# Altium PCB pulser one pad.PcbDoc
Units mil, origin at the board's own origin, x right, y up, seen from the top; angles counter-clockwise.
Board outline 1375 x 1010 mil, 2 copper layers (Top Layer, Bottom Layer); 38 components, 23 nets, 110 pads, 20 vias.
Unrouted connection lines stored in the file: 1.
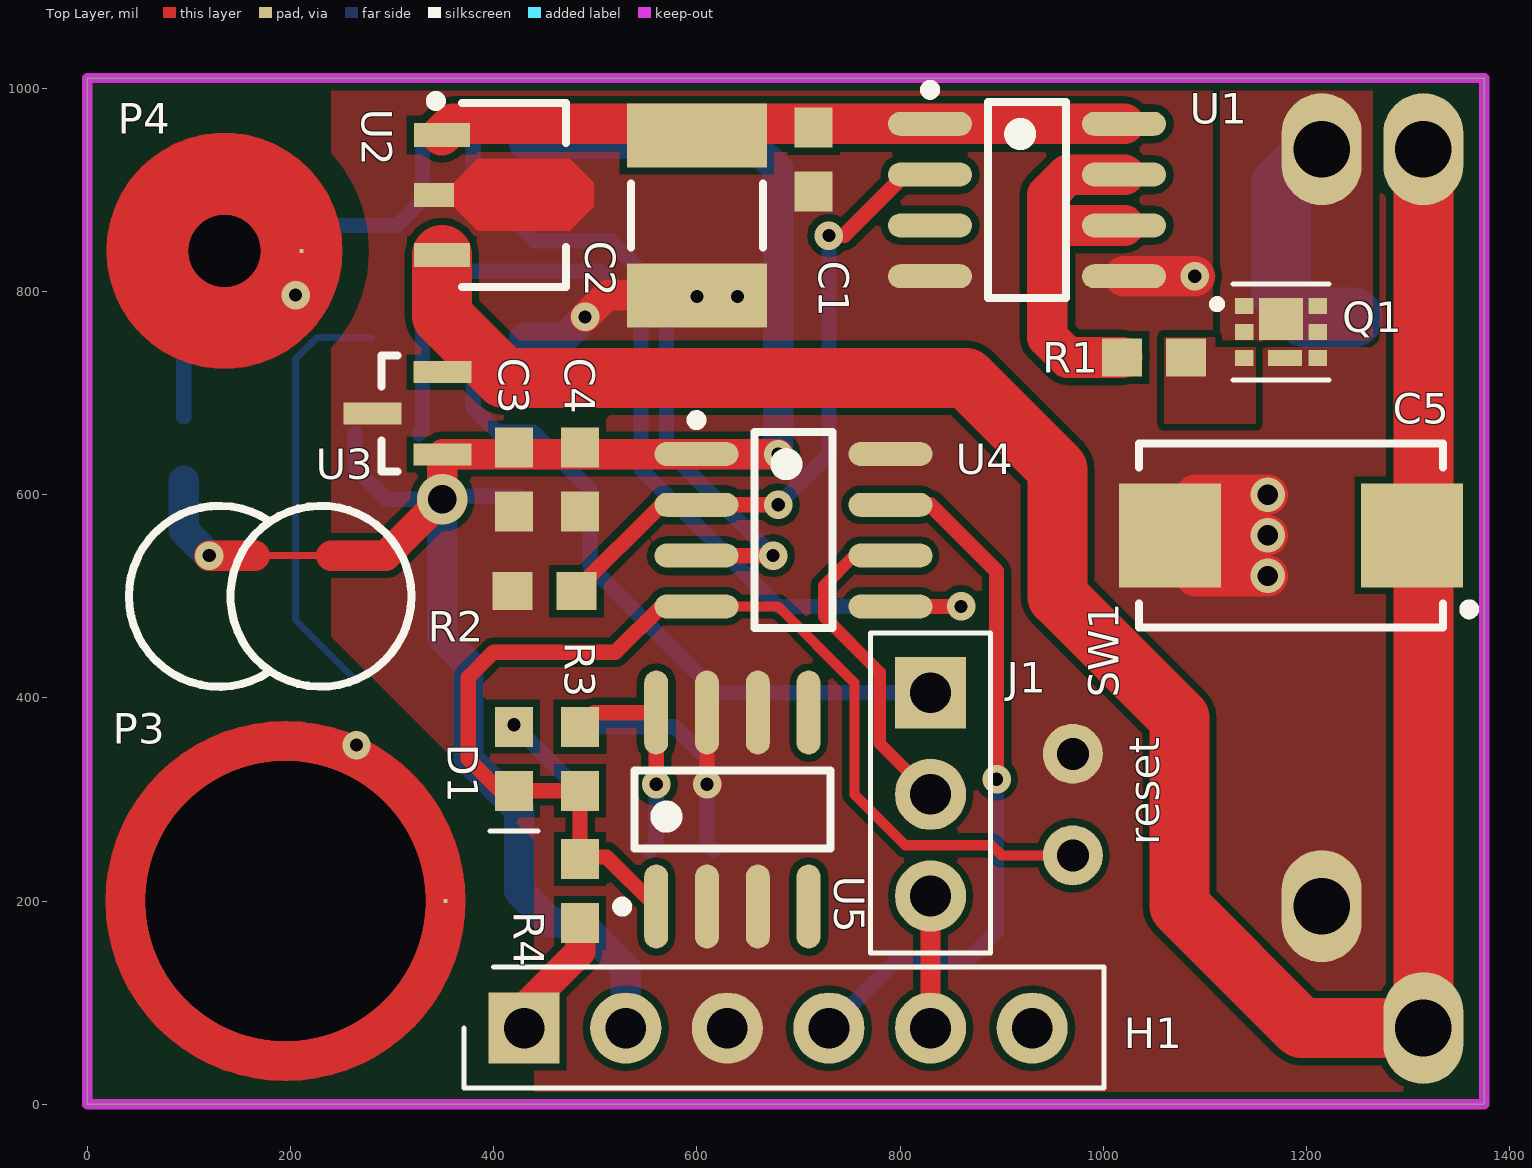
[diagram p0: Top Layer view]
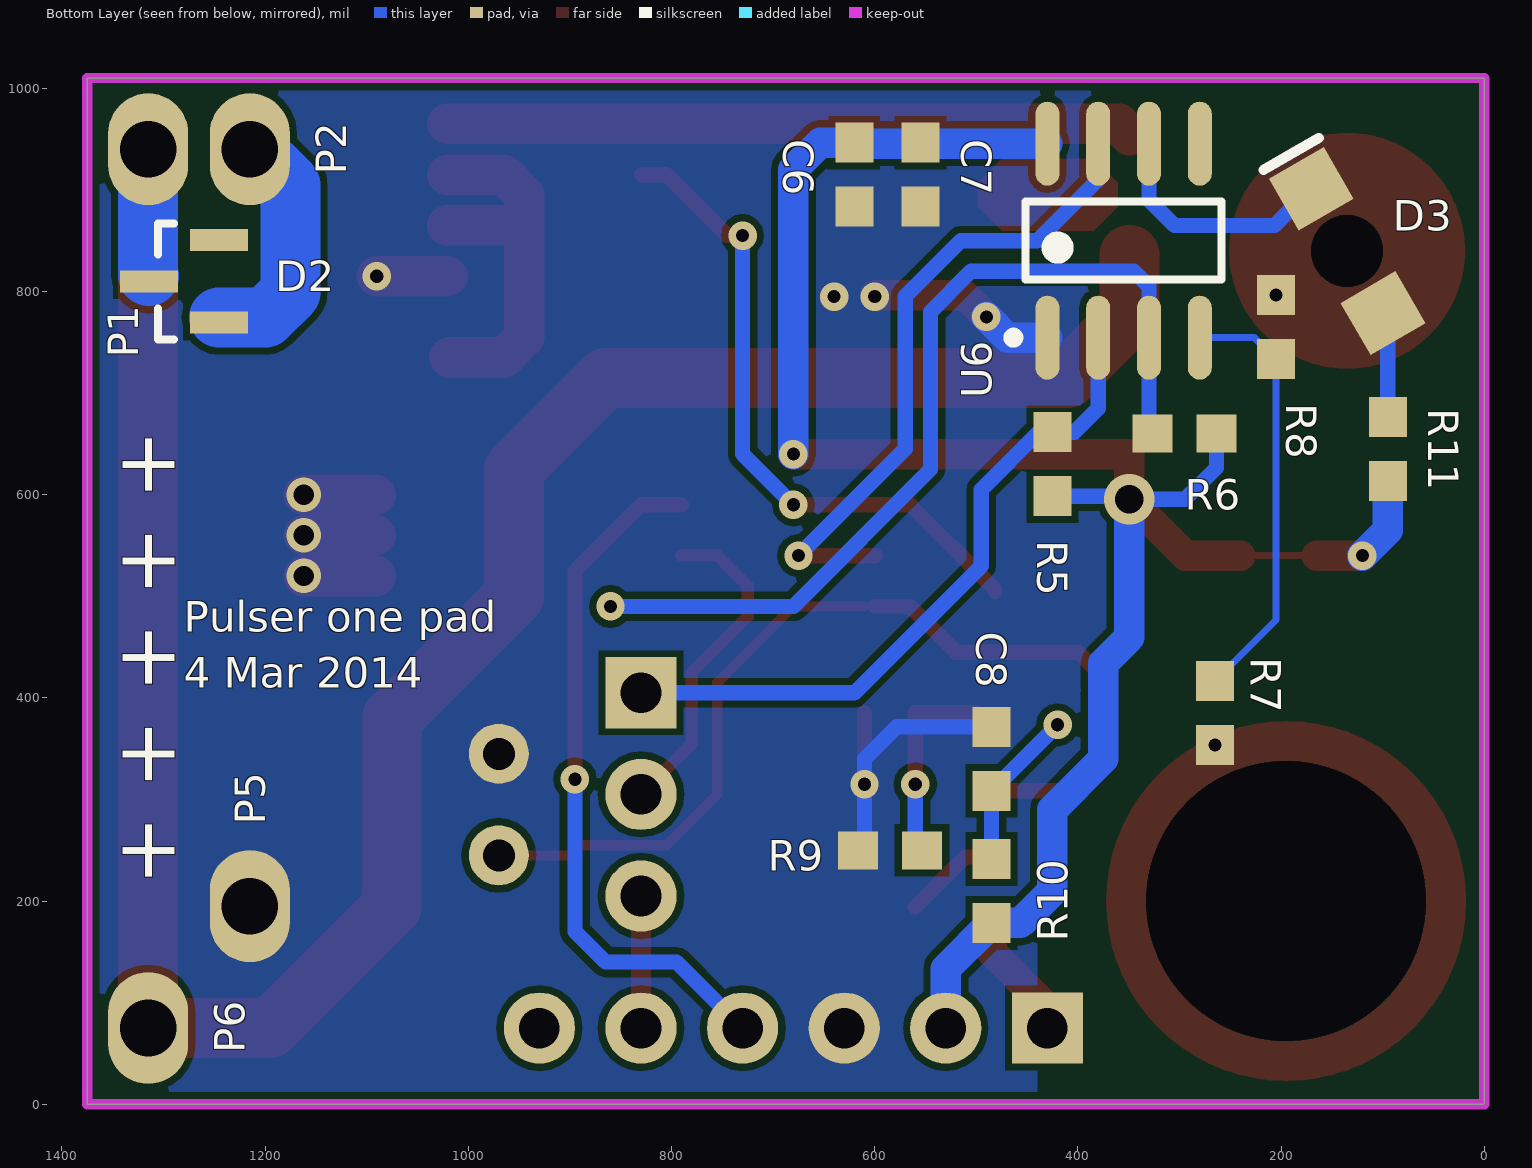
[diagram p1: Bottom Layer view, seen from below]

## Layer stack, top to bottom
Top Solder: solder mask 0.4, Solder Resist, Dk 3.5
Top Layer: signal copper 1.4
Dielectric1: core 12.6, FR-4, Dk 4.8
Bottom Layer: signal copper 1.4
Bottom Solder: solder mask 0.4, Solder Resist, Dk 3.5

## Board outline
0,0 1375,0 1375,1010 0,1010

## Design rules (kind name [scope] priority, off if disabled: settings)
Clearance ClearanceCapsense [InNetClass('capsense') vs not(InNetClass('capsense') OR OnLayer('Keep-Out Layer'))] p1: gap=26
Clearance [All] p2: gap=7
ComponentClearance [All] p1 off: gap=10 collisioncheckmode=3 verticalgap=10 showdistances=FALSE
HoleSize [All] p1: absolutevalues=TRUE maxlimit=500 minlimit=13 maxpercent=80.000 minpercent=20.000
MinimumAnnularRing [All] p1: minimumring=7
MinimumSolderMaskSliver [All] p1: minsoldermaskwidth=6
PolygonConnect [All] p1: connectstyle=Direct reliefconductorwidth=10 reliefentries=4 polygonreliefangle="90 Angle" airgapwidth=10
RoutingVias [All] p1: holewidth=10 width=24 viastyle="Through Hole" minholewidth=10 minwidth=24 maxholewidth=28 maxwidth=78.74
SilkToSilkClearance [All] p1: silktosilkclearance=0
SilkToSolderMaskClearance SilkscreenOverComponentPads [IsPad] p1: minsilkscreentomaskgap=5 clearancetoexposedcopper=TRUE
SolderMaskExpansion SolderMaskExpansion_via [IsVia] p1: expansion=-2
SolderMaskExpansion [All] p2: expansion=4
Width [All] p1: maxlimit=78.74 minlimit=6 preferedwidth=15 minimp=50.000000 maximp=50.000000 favimp=50.000000
24 further rules are at their usual default settings.

## Classes and differential pairs
net class capsense: NetP3_1 NetP4_1 NetR7_1

## Components (designator, comment, footprint, x,y, rotation, side; value= is the part's Value field where it differs from the comment)
C1 "Cap" SMD0603 715,930 r90 top
C2 "Cap" SMD1812 600,875 r90 top
C3 "Cap" SMD0603 420,615 r90 top
C4 "Cap" SMD0603 485,615 r90 top
C5 "CapPol" "TANT CAP SIZE D" 1185,560 r180 top
C6 "Cap" SMD0603 620,915 r90 bottom
C7 "Cap" SMD0603 555,915 r90 bottom
C8 "Cap" SMD0603 485,340 r270 bottom
D1 "CD0603-B00340" "SMD0603 POLARIZED" 420,340 r90 top
D2 "BAT750" "SOT23 - DIODES" 1280,810 r0 bottom
D3 "597-6001-607F" "SMD1206 Rev Mount LED" 135,840 r240 bottom
H1 "6 pin header" "6 PIN HEADER" 430,75 r0 top
J1 "jumper" "3 PIN HEADER" 830,405 r270 top
P1 "16AWG Solder Point" "16 AWG SOLDER POINT" 1315,940 r0 bottom net-tie
P2 "16AWG Solder Point" "16 AWG SOLDER POINT" 1215,940 r180 bottom net-tie
P3 "capsense pad" "CAPSENSE RUBY" 195,200 r0 top net-tie
P4 "capsense pad" "capsense ruby 5.9mm" 135,840 r0 top
P5 "16AWG Solder Point" "16 AWG SOLDER POINT" 1215,195 r180 bottom net-tie
P6 "16AWG Solder Point" "16 AWG SOLDER POINT" 1315,75 r180 bottom net-tie
Q1 "CSD16301Q2" CSD16301Q2 1175,760 r270 top
R1 "Res" SMD0603 1050,735 r180 top
R2 "Res" SMD0603 450,505 r180 top
R3 "Res" SMD0603 485,340 r270 top
R4 "Res" SMD0603 485,210 r270 top
R5 "Res" SMD0603 425,630 r270 bottom
R6 "Res" SMD0603 295,660 r180 bottom
R7 "Res" SMD0603 265,385 r270 bottom
R8 "Res" SMD0603 205,765 r90 bottom
R9 "Res" SMD0603 585,250 r0 bottom
R10 "Res" SMD0603 485,210 r90 bottom
R11 "Res" SMD0603 95,645 r270 bottom
SW1 "GB215AH" GB215AH 970,295 r180 top
U1 "TC4452" "8 PIN SOIC" 925,890 r0 top
U2 "UA78L09ACPK" SOT89-150P350X160-3N 410,895 r0 top
U3 "ZMR330" "SOT23 - DIODES" 315,680 r180 top
U4 "PIC12F1840-I/SN" "8 PIN SOIC" 695,565 r0 top
U5 "LM431BCMX" "8 PIN SOIC" 635,290 r90 top
U6 "CY8C20121-SX1I" "8 PIN SOIC" 355,850 r90 bottom

## Footprints (in the part's own frame and the unit in brackets; to place one, negate y for a bottom-side part, rotate by r counter-clockwise, add the part's x,y. Pads: shape width x height; smd on the part's side, far side on the other; paste and mask are expansions set on the pad)
"3 PIN HEADER" [mil] "3 PIN 0.1\" header"
  rect 70x70 hole 40: 1(0,0)
  round 70 hole 40: 2(100,0) 3(200,0)
  silkscreen extent -59,-59 256,59
"6 PIN HEADER" [mil] "6 pin 0.1\" header"
  rect 70x70 hole 40: 1(0,0)
  round 70 hole 40: 2(100,0) 3(200,0) 4(300,0) 5(400,0) 6(500,0)
  silkscreen extent -59,-59 571,60
"8 PIN SOIC" [mm] "SOIC, 8-Leads"
  oval 2.1x0.6 smd: 1(-2.425,1.905) 2(-2.425,0.635) 3(-2.425,-0.635) 4(-2.425,-1.905) 5(2.425,-1.905) 6(2.425,-0.635) 7(2.425,0.635) 8(2.425,1.905)
  silkscreen extent -2.55,-2.45 0.98,2.88, body extent -1.95,-2.45 1.95,2.45, height 1.75
"16 AWG SOLDER POINT" [mm] "Solder Point for 16 AWG Wire"
  oval 2x2.8 hole 1.42: 1(0,0)
"CAPSENSE RUBY" [mm] "Hole for cabsense ruby"
  round 0 hole 7 unplated: 0(0,0)
  rect 0.1x0.1 smd: 1(4,0)
  Top Layer circle w1: c0,0 r4
"capsense ruby 5.9mm" [mm] "Capsense pad designed for use with ruby and rev mount LED"
  rect 0.1x0.1 smd: 1(1.925,0)
  Top Layer circle w2.05: c0,0 r1.925
CSD16301Q2 [mm] "N ch MOSFET"
  rect 0.4x0.46 smd mask+0: 1(-0.65,-0.92) 2(0,-0.92) 3(0.65,-0.92) 4(0.65,0.92) 5(0,0.92) 6(-0.65,0.92)
  rect 1.05x1.1 smd mask+0: 7(-0.325,0)
  rect 0.4x0.85 smd mask+0: 8(0.65,0.095)
  silkscreen extent -1.2,-1.7 1.2,1.2, body extent -1,-1 1,1, height 0.8
GB215AH [mm] "Through Hole Momentary Switch"
  round 1.5 hole 0.8: 1(0,1.27) 2(0,-1.27)
  body extent -1.25,-3.5 1.25,3.5, height 10.2
SMD0603 [mm] "0603 Surface Mount Chip"
  rect 1x0.95 smd: 1(-0.8,0) 2(0.8,0)
  body extent -0.88,-0.48 0.87,0.48, height 0.6
"SMD0603 POLARIZED" [mm] "0603 Surface Mount Chip"
  rect 1x0.95 smd: 1(-0.8,0) 2(0.8,0)
  silkscreen extent -1.8,-0.6 -1.8,0.6, body extent -0.88,-0.48 0.87,0.48, height 0.6
"SMD1206 Rev Mount LED" [mm] "1206 Reverse mount LED, 1.8mm hole"
  rect 0x0 hole 1.8 unplated: 0(0,0)
  rect 1.5x1.59 smd: A(1.795,0) K(-1.795,0)
  silkscreen extent -2.8,-0.8 -2.8,0.8
SMD1812 [mm] "Chip Capacitor, 2-Leads, Body 4.5x3.2mm, IPC Medium Density"
  rect 1.6x3.5 smd: 1(-2,0) 2(2,0)
  silkscreen extent -0.8,-1.65 0.8,1.65, body extent -2.4,-1.75 2.4,1.75, height 2
"SOT23 - DIODES" [mm] "Special SOT23 design for Diodes Part"
  rect 1.45x0.55 smd: 1(0.875,0) 2(-0.875,1.03) 3(-0.875,-1.03)
  silkscreen extent 0.25,-1.45 0.65,1.45, body extent -0.65,-1.45 0.65,1.45, height 1.05
SOT89-150P350X160-3N [mm] "SOT89, 3-Leads, Body 4.50x2.50mm, Pitch 1.50mm, Lead Span 3.5mm, IPC Medium Density"
  rect 1.4x0.6 smd: 1(-1.55,1.5) 3(-1.55,-1.5)
  rect 1x0.6 smd: 2(-1.75,0)
  Top Layer region: -1.25,0.3 -0.65,0.9 1.65,0.9 2.25,0.3 2.25,-0.3 1.65,-0.9 -0.65,-0.9 -1.25,-0.3
  silkscreen extent -1.82,-2.3 1.55,2.47, body extent -1.05,-2.3 1.55,2.3, height 1.6
"TANT CAP SIZE D" [mm] "Kemet Size D, 7343"
  rect 2.55x2.6 smd: 1(-3.025,0) 2(3.025,0)
  silkscreen extent -4.58,-2.3 3.8,2.3, body extent -3.8,-2.3 3.8,2.3, height 3.1

## Part data
C1 C2 C3 C4 C5 C6 C7 C8: "Capacitor"
D1: "Schottky Diode"
D2: "Schottky Diode high current"
D3: library part "1206 reverse mount LED", "Reverse Mount 1206 LED"
H1: "6 Pin Header"
J1: "Three Pin Jumper"
P3 P4: library part "capsense pad 1", "circular capsense pad"
Q1: "N Ch. MOSFET"
R1 R2 R3 R4 R5 R6 R7 R8 R9 R10 R11: "Resistor"
SW1: "SPST Normally Open Switch"
U1: "MOSFET Gate Driver, Low Side, Non Inverting 13A max"
U2: "9V linear fixed regulator, TI Part"
U3: "Diodes 3.3V LDO regulator, 50mA"
U4: "8 Bit RISC uController"
U5: "Adjustable Voltage Reference"
U6: "Capsense Module, 2 button"

## Via types
v1: diameter 28, hole 13, Top Layer to Bottom Layer, 16 vias
v2: diameter 34, hole 20, Top Layer to Bottom Layer, 3 vias
v3: diameter 50, hole 28, Top Layer to Bottom Layer, 1 vias

## Nets (pads, with @x,y where several pads share a name; then routed paths per layer and width w, separated by ;. In a path a pad name is that pad's centre, name@x,y a point inside that pad or via, vN(x,y) a via of type N, cw(c..) or ccw(c..) an arc to the next point about the centre after c; other vN are vias at no path point)
3V3: C3.2 C4.2 C6.2 C7.2 H1.2 R5.2 R6.2 R10.1 R11.2 U3.2 U4.1 U6.8 | length 2063.5
  Top Layer w7: 165,540 240,540
  Top Layer w30: v1(120,540) 165,540 ; 240,540 293.9,540 v3(349.45,595.55) U3.2 ; U3.2@350,640 U4.1 v1(680,640)
  Bottom Layer w15: R6.2 263.5,626.5 294.45,595.55 v3(349.45,595.55) ; v3@352.4,598.5 R5.2
  Bottom Layer w30: R11.2 95,565 v1(120,540) ; v3(349.45,595.55) 349.45,459.45 375,433.9 375,410 ; 375,405 375,340 425,290 425,210 456.5,178.5 R10.1 530,133.5 H1.2 ; U6.8 618.98,945.48 C6.2 653.5,946.5 680,920 v1(680,640)
9V0: C1.2 C2.2 U1.1 U1.8 U2.1 | length 676
  Top Layer w40: U2.1 359.93,965 U1.1 U1.8
"CAP SENSE OUT": U4.3 U6.7 | length 647.1
  Top Layer w15: U4.3 v1(675,540)
  Bottom Layer w15: U6.7 380,910 440,850 515,850 570,795 570,645 v1(675,540)
GND: C1.1 C2.1 C3.1 C4.1 C5.2 C6.1 C7.1 C8.1 H1.3 P5.1 Q1.4 Q1.8 R2.2 R9.2 SW1.2 U1.4 U1.5 U2.2 U3.1 U4.8 U5.2 U5.3 U5.6 U5.7 U6.1 | length 770.7
  Top Layer w15: v1(610,315) U5.7
  Top Layer w30: v1(490,775) 511.26,796.26 C2.1
  Top Layer w40: U1.5 v1(1090,815) ; C5.2@1090.91,520 v2(1161.81,520) ; C5.2@1090.91,560 v2(1161.81,560) ; C5.2@1090.91,600 v2(1161.81,600)
  Bottom Layer w15: C8.1 578.5,371.5 610,340 v1(610,315) 610,256.5 R9.2
  Bottom Layer w30: U6.1 469.53,754.53 v1(490,775)
  other v1: 600,795 640,795
ICSPCLK: H1.5 J1.3 | length 130
  Top Layer w20: H1.5 J1.3
ICSPDAT: H1.4 U4.7 | length 690.8
  Top Layer w15: U4.7 830,590 895,525 v1(895,320)
  Bottom Layer w15: H1.4 795,140 865,140 895,170 v1(895,320)
LED_RET: D2.2 P2.1 Q1.1 Q1.2 Q1.5 Q1.6 Q1.7 | length 243.3
  Bottom Layer w59.06: P2.1@1215,945 1175,905 1175,798.9 1199.45,774.45 D2.2@1245.55,774.45
LED_RUBY: D3.K U6.6 | length 240.5
  Bottom Layer w15: D3.K 206.54,865 305,865 330,890 U6.6
NetC8_2: C8.2 D1.2 R10.2 | length 158.9
  Bottom Layer w15: v1(420,373.5) C8.2 R10.2
NetD1_1: D1.1 R3.2 R4.1 SW1.1 U4.4 U5.1 | length 1142.8
  Top Layer w10: U4.4@610,490 680,490 755,415 755,305 805,255 890,255 900,245 SW1.1
  Top Layer w15: U5.1 511.02,243.5 485,243.5 R3.2 D1.1 406.5,308.5 375,340 375,420 400,445 520,445 565,490 U4.4
NetD3_A: D3.A R11.1 | length 104.2
  Bottom Layer w15: R11.1 95,774.13 D3.A
NetJ1_1: J1.1 R5.1 U6.2 | length 679.4
  Bottom Layer w15: U6.2 380,685 403.5,661.5 R5.1 438.5,661.5 495,605 495,530 620,405 J1.1
NetJ1_2: J1.2 U4.6 | length 326.4
  Top Layer w12: U4.6 755,540 725,510 725,480 780,425 780,355 J1.2
NetP3_1: P3.1 R7.2
  other v1: 265,353.5
NetP4_1: P4.1 R8.2
  other v1: 205,796.5
NetQ1_3: Q1.3 R1.1
NetR1_2: R1.2 U1.6 U1.7 | length 381
  Top Layer w40: 945,865 U1.6 ; R1.2 965,735 945,755 945,895 965,915 U1.7
NetR2_1: R2.1 U1.2 U4.2 | length 644.7
  Top Layer w15: R2.1 481.5,506.5 565,590 U4.2 v1(680,590) ; v1(730,855) 745,855 805,915 U1.2
  Bottom Layer w15: v1(680,590) 730,640.01 v1(730,855)
NetR3_1: R3.1 R9.1 U5.8 | length 219
  Top Layer w15: R3.1 498.98,385.48 U5.8 v1(560,315)
  Bottom Layer w15: R9.1 560,256.49 v1(560,315)
NetR6_1: R6.1 U4.5 U6.3 | length 979.7
  Top Layer w15: U4.5 v1(860,490)
  Bottom Layer w15: R6.1 330,663.51 U6.3 330,805 345,820 505,820 545,780 545,625 680,490 v1(860,490)
NetR7_1: R7.1 R8.1 U6.4 | length 425.6
  Bottom Layer w7: R7.1 205,476.5 R8.1 226.03,754.53 U6.4
VIN+: C5.1 D2.1 P1.1 P6.1 U2.3 U3.3 | length 2498.1
  Top Layer w59.06: U2.3 348.98,776.02 410,715 865,715 955,625 955,500 1075,380 1075,195 1195,75 P6.1 P1.1@1315,945
  Bottom Layer w59.06: D2.1@1314.45,815 1315,815.55 P1.1@1315,945
VPP: H1.1 R4.2 | length 161.6
  Top Layer w15: H1.1@405,100 H1.1
  Top Layer w30: H1.1 430,95 485,150 R4.2
pads on no net: D2.3 D3.0 H1.6 P3.0 U1.3 U5.4 U5.5 U6.5

## Polygon pours and split planes (outlines as drawn)
GND on Bottom Layer "GND" (solid, remove dead copper, pour order 11): 1165,120 1265,120 1360,215 1360,830 1075,830 1075,210
GND on Bottom Layer "GND BOT" (solid, remove dead copper, pour order 12): 1375,0 1375,1010 240,1010 240,460 440,260 440,0
LED_RET on Top Layer "Drain" (solid, pour order 10): 1265,1010 1265,745 1115,745 1115,1010
GND on Top Layer "Source" (solid, pour order 9): 1160,745 1160,660 1030,605 1030,510 1110,510 1260,660 1260,745
NetQ1_3 on Top Layer "Gate" (solid, pour order 8): 1150,670 1060,670 1060,755 1110,755 1110,745 1150,745
GND on Top Layer "GND TOP" (solid, remove dead copper, pour order 13): 1375,0 1375,1010 240,1010 240,460 440,260 440,0

## Keep-outs
Keep-Out Layer:
  the board outline again, w10

## Silkscreen, mask and mechanical layers (free items; w line width, h text height)
Top Overlay:
  circle w8: c230,500 r89.02
  lines w8: 179.38,425.93 cw(c130,500) 179.38,574.07
  text "reset" at 1054.99,255 h30 r90
Bottom Overlay:
  text "Pulser one pad" at 1280,465 h30
  text "4 Mar 2014" at 1280,410 h30
  text "+ + + + +" at 1340,215 h60 r90
Top Solder:
  rectangle: 1075,670 1150,740
  rectangle: 1160,670 1260,740
  rectangle: 1120,750 1230,865